# Altium PCB KeypadHW10.PcbDoc
Units mm, origin at the board's own origin, x right, y up, seen from the top; angles counter-clockwise.
Board outline 31.06 x 42.9 mm, 2 copper layers (Top Layer, Bottom Layer); 33 components, 34 nets, 107 pads, 16 vias.
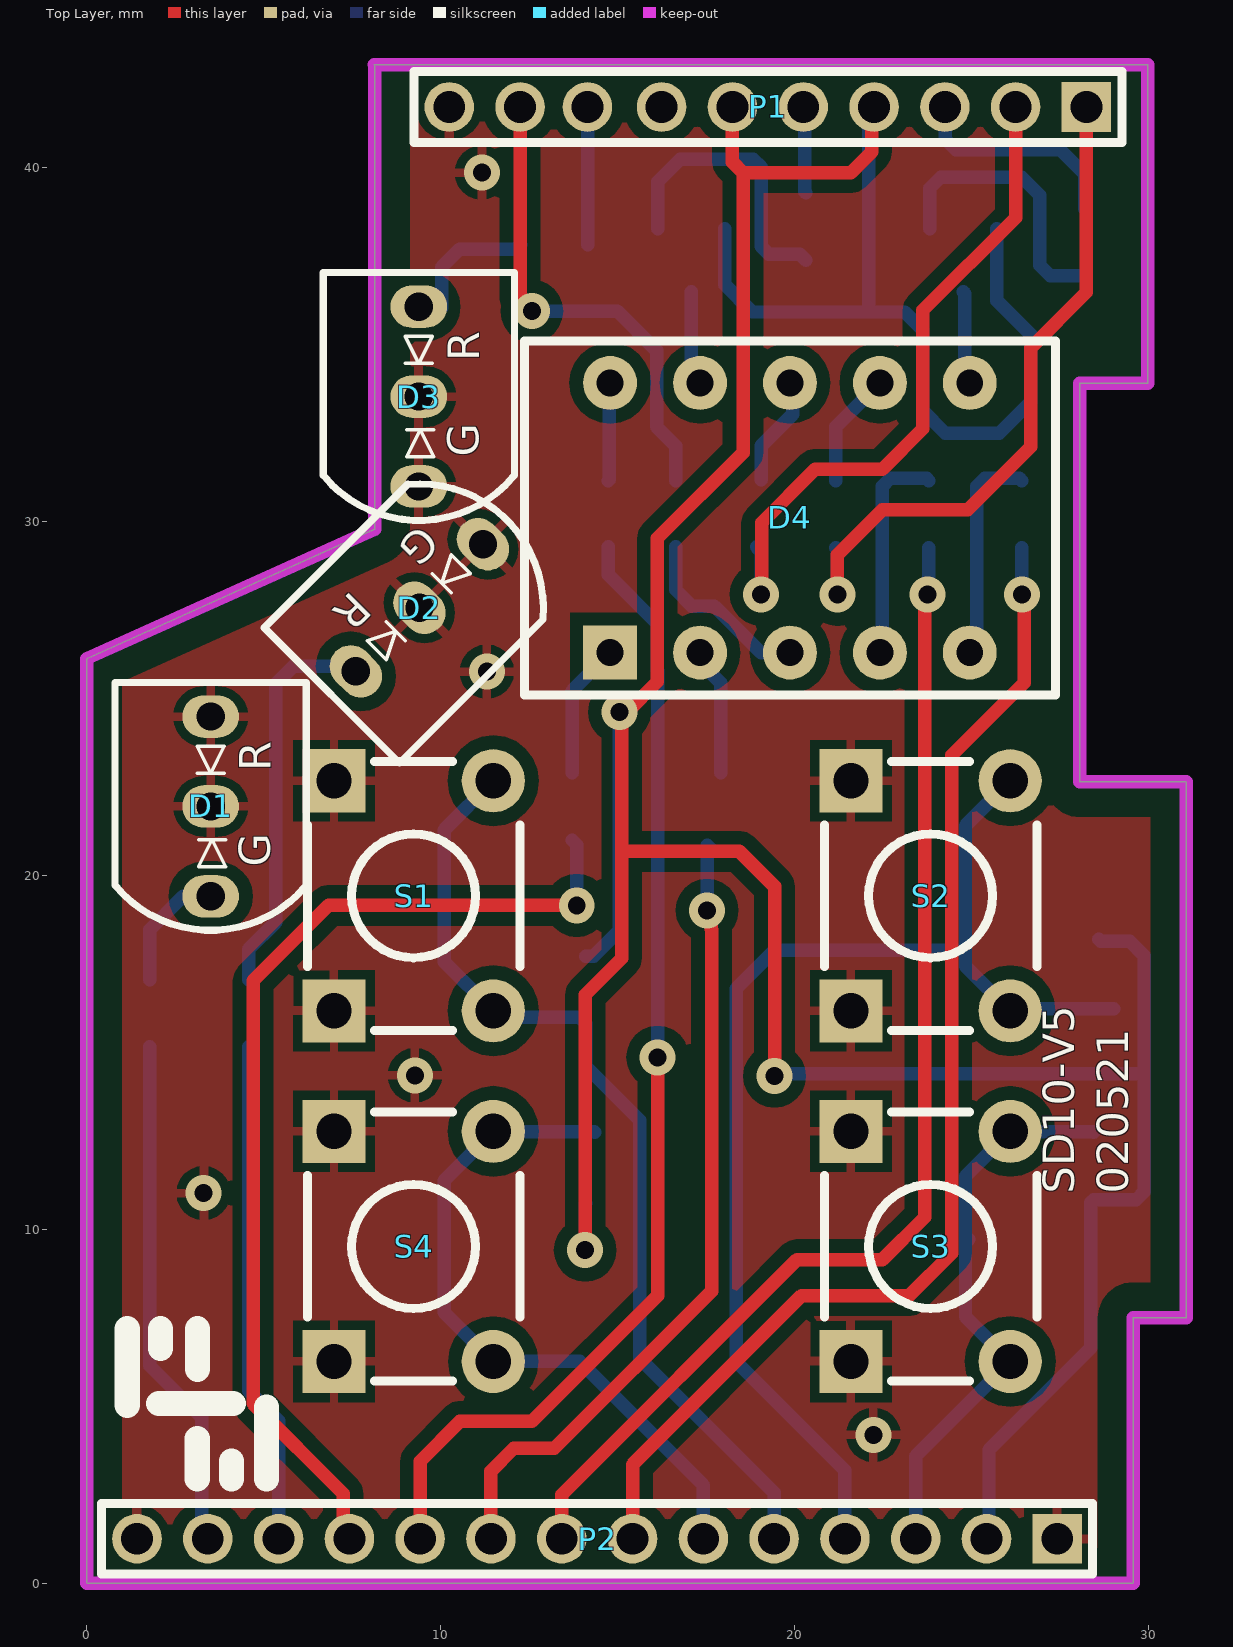
[diagram p0: Top Layer view]
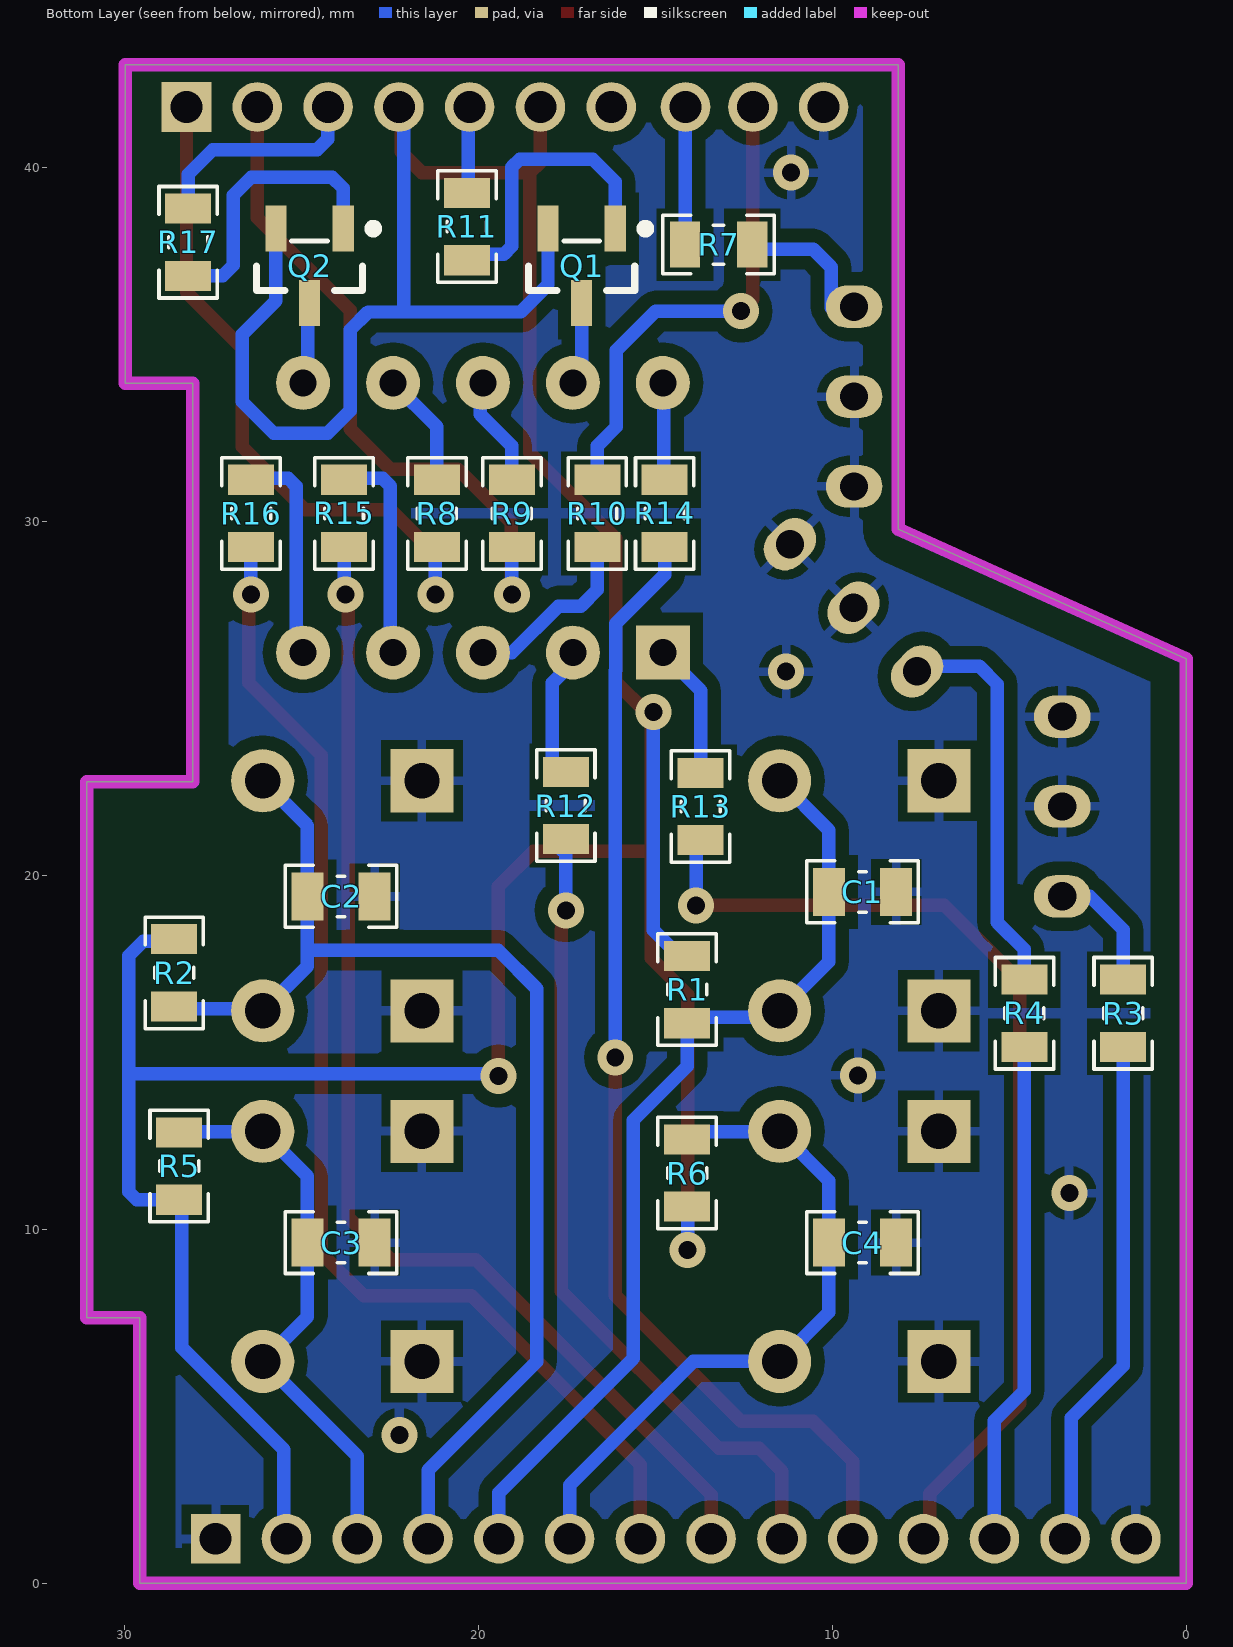
[diagram p1: Bottom Layer view, seen from below]
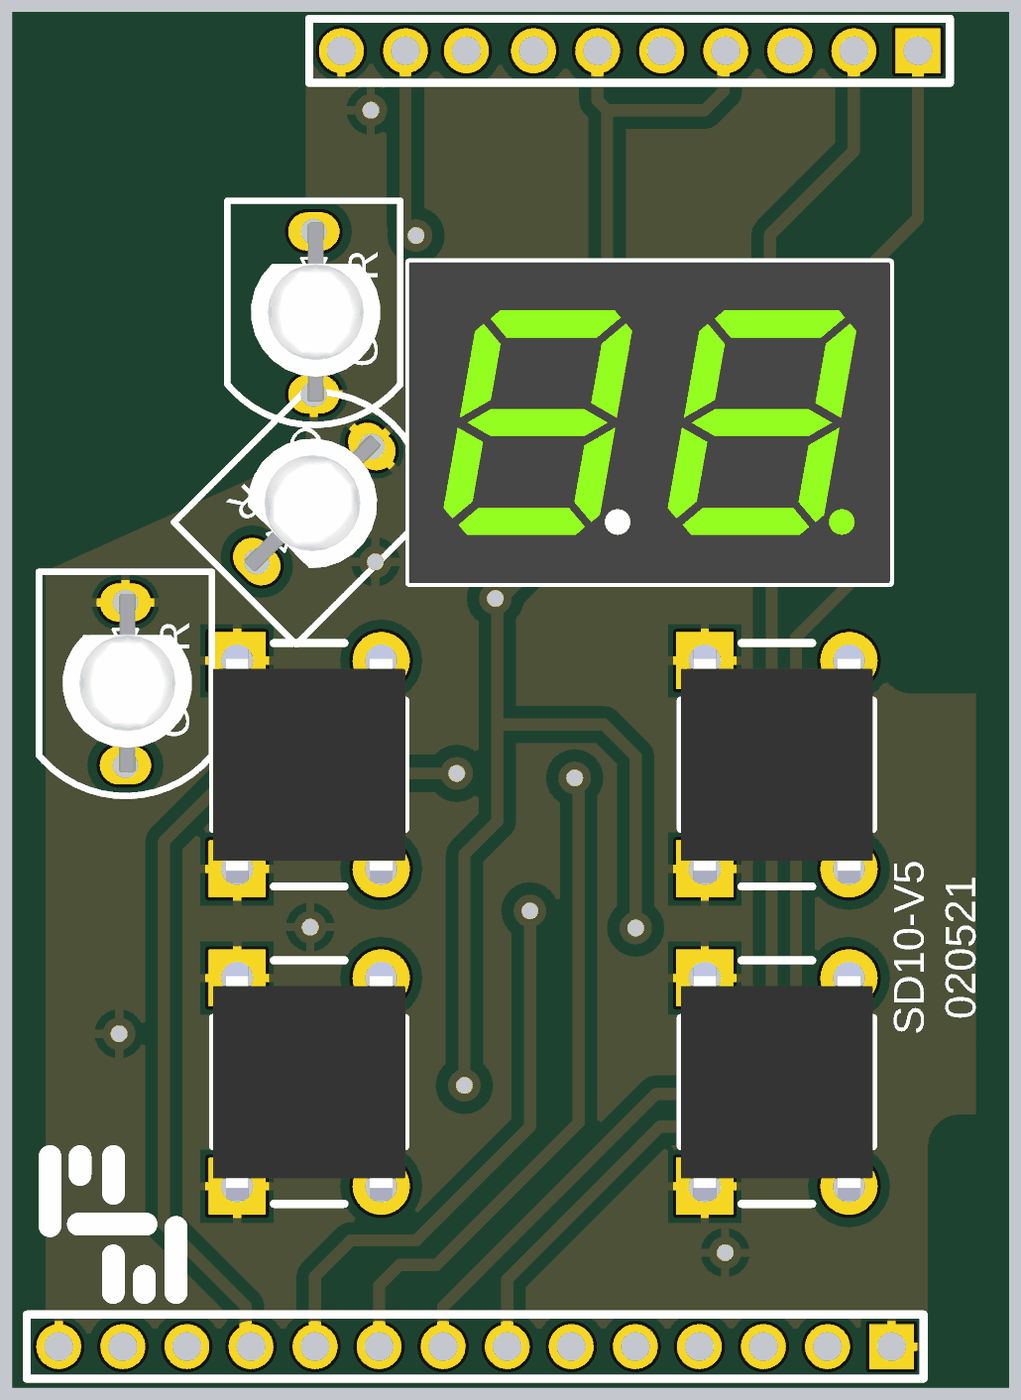
[diagram p2: 3D render of the assembled board from above, using the file's embedded part models]
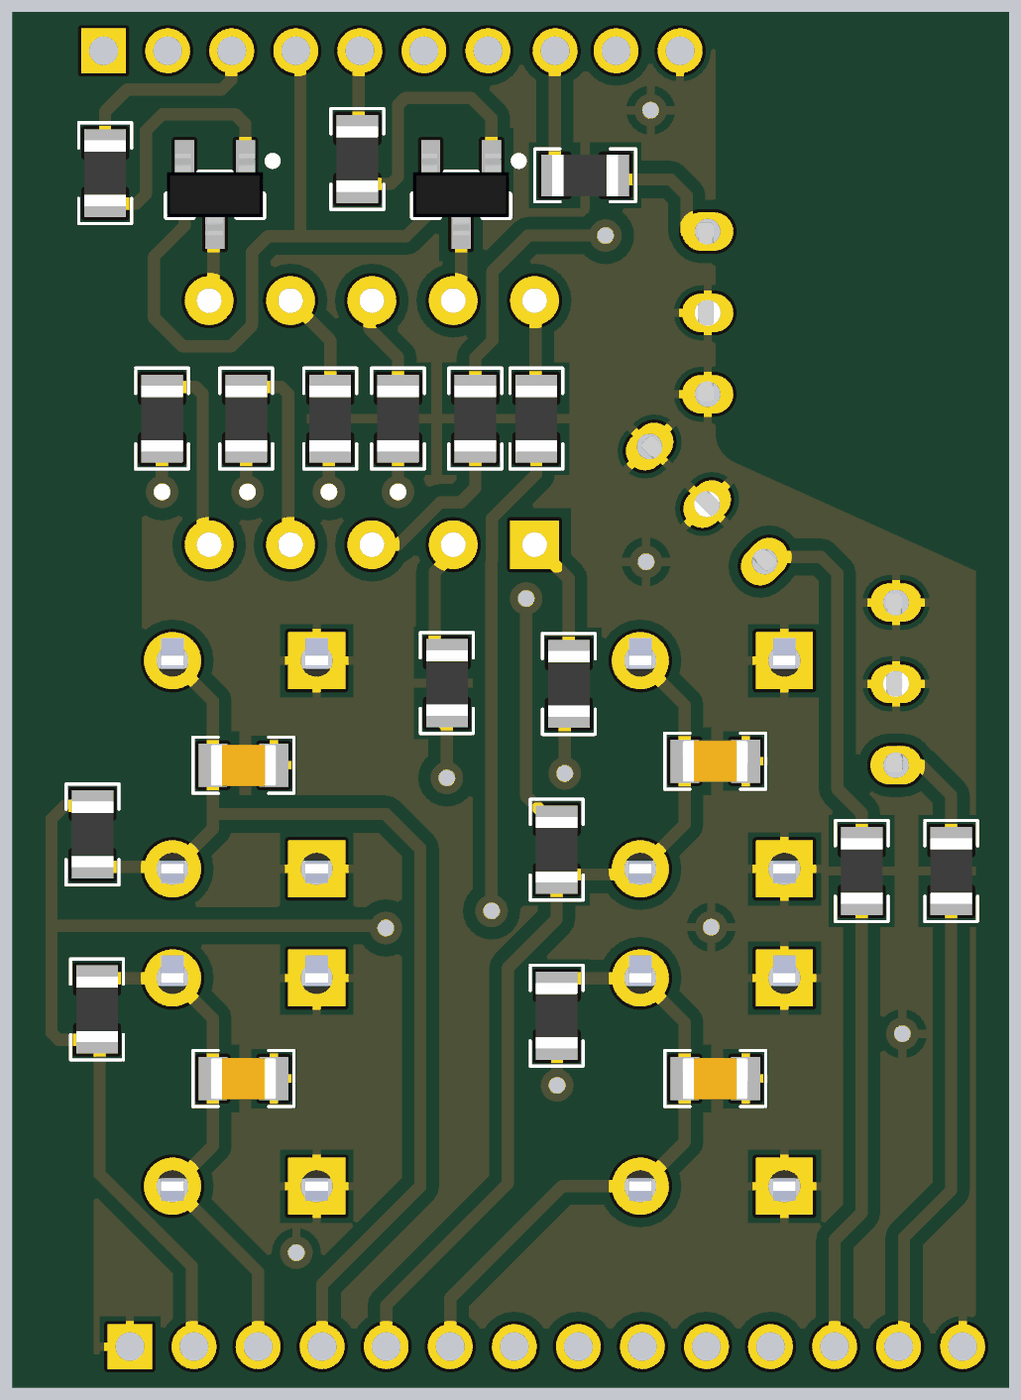
[diagram p3: 3D render of the assembled board from below, using the file's embedded part models]

## Layer stack, top to bottom
Top Solder: solder mask 0.0102, Solder Resist, Dk 3.5
Top Layer: signal copper 0.0356
Dielectric 1: dielectric 0.32, FR-4, Dk 4.8
Bottom Layer: signal copper 0.0356
Bottom Solder: solder mask 0.0102, Solder Resist, Dk 3.5

## Board outline
0,0 0,26.124 8.13,29.78 8.13,42.9 8.128,42.9 29.972,42.9 29.972,33.908 28.06,33.908 28.06,22.646 31.06,22.646 31.06,7.5 29.56,7.5 29.56,0

## Design rules (kind name [scope] priority, off if disabled: settings)
BoardOutlineClearance [All] p1: gap=1 ignorepadtopadclearanceinfootprint=FALSE
Clearance [All] p1: gap=0.381 ignorepadtopadclearanceinfootprint=FALSE except(0.254: Arc-THPad Track-THPad)
ComponentClearance [All] p1: gap=0 collisioncheckmode=3 verticalgap=0.254 showdistances=FALSE
PolygonConnect [All] p1: connectstyle=Relief reliefconductorwidth=0.254 reliefentries=4 polygonreliefangle="90 Angle" airgapwidth=0.254
RoutingVias [All] p1: holewidth=0.508 width=1.016 viastyle="Through Hole" minholewidth=0.508 minwidth=1.016 maxholewidth=0.711 maxwidth=1.27
SilkToSolderMaskClearance [IsPad] p1: minsilkscreentomaskgap=0.102 clearancetoexposedcopper=TRUE
SolderMaskExpansion [All] p1: expansion=0.102 istentingtop=FALSE
Width [All] p1: maxlimit=2.54 minlimit=0.381 preferedwidth=0.381 minimp=50.000000 maximp=50.000000 favimp=50.000000
28 further rules are at their usual default settings.

## Components (designator, comment, footprint, x,y, rotation, side; value= is the part's Value field where it differs from the comment)
C1 "100nF" CAP0805 9.144,19.532 r0 bottom
C2 "100nF" CAP0805 23.876,19.405 r0 bottom
C3 "100nF" CAP0805 23.876,9.626 r0 bottom
C4 "100nF" CAP0805 9.144,9.626 r0 bottom
D1 "LED3MM" LED3MM_R&G 3.5,21.945 r90 top
D2 "LED3MM" LED3MM_R&G 9.398,27.559 r225 top
D3 "LED3MM" LED3MM_R&G 9.382,33.526 r90 top
D4 "FYT-5631Bx" 7SEG-2DIGIT-15X10 19.866,30.1 r0 top
P1 "Header 10" HDR_1X10-2MM 19.242,41.707 r180 top
P2 "Header 14" HDR_1X14-2MM 14.419,1.258 r180 top
Q1 "PMBT3906" SOT23_N 17.079,37.219 r270 bottom
Q2 "PMBT3906" SOT23_N 24.765,37.219 r270 bottom
R1 "100K" RES0805 14.097,16.77 r90 bottom
R2 "100K" RES0805 28.589,17.246 r90 bottom
R3 "1K" RES0805 1.778,16.103 r90 bottom
R4 "1K" RES0805 4.572,16.103 r90 bottom
R5 "100K" RES0805 28.448,11.785 r270 bottom
R6 "100K" RES0805 14.097,11.589 r270 bottom
R7 "1K" RES0805 13.208,37.82 r180 bottom
R8 "220R" RES0805 21.167,30.226 r90 bottom
R9 "220R" RES0805 19.05,30.226 r90 bottom
R10 "220R" RES0805 16.637,30.226 r270 bottom
R11 "10K" RES0805 20.32,38.328 r90 bottom
R12 "220R" RES0805 17.526,21.971 r90 bottom
R13 "220R" RES0805 13.716,21.945 r90 bottom
R14 "220R" RES0805 14.732,30.226 r90 bottom
R15 "560R" RES0805 23.791,30.226 r90 bottom
R16 "220R" RES0805 26.416,30.226 r90 bottom
R17 "10K" RES0805 28.194,37.886 r90 bottom
S1 "SW-PB" SW-4PIN 9.235,19.421 r270 top
S2 "SW-PB" SW-4PIN 23.84,19.421 r270 top
S3 "SW-PB" SW-4PIN 23.84,9.515 r270 top
S4 "SW-PB" SW-4PIN 9.235,9.515 r270 top

## Footprints (in the part's own frame and the unit in brackets; to place one, negate y for a bottom-side part, rotate by r counter-clockwise, add the part's x,y. Pads: shape width x height; smd on the part's side, far side on the other; paste and mask are expansions set on the pad)
7SEG-2DIGIT-15X10 [mil] "0.28\" 2-DIGIT,CL2821BS"
  rect 60x60 hole 30: 1(-200,-150)
  round 60 hole 30: 2(-100,-150) 3(0,-150) 4(100,-150) 5(200,-150) 6(200,150) 7(100,150) 8(0,150) 9(-100,150) 10(-200,150)
  silkscreen extent -295,-197 295,197, body extent -296,-197 296,197, height 240
CAP0805 [mm] "Chip Capacitor, 2-Leads, Body 2/00x1/25mm, IPC Medium Density DESIGNER:ABBAS BASEREH"
  rect 0.9x1.35 smd: 1(-0.95,0) 2(0.95,0)
  silkscreen extent -1.58,-0.87 1.58,0.87, body extent -1.02,-0.65 1.02,0.65, height 0.5
HDR_1X10-2MM [mm]
  rect 1.4x1.4 hole 0.9: 1(-9,0)
  round 1.4 hole 0.9: 2(-7,0) 3(-5,0) 4(-3,0) 5(-1,0) 6(1,0) 7(3,0) 8(5.097,0) 9(7,0)
  round 1.4 hole 0.9 mask+0.102: 10(9,0)
  silkscreen extent -10,-1 10,1
HDR_1X14-2MM [mm]
  rect 1.4x1.4 hole 0.9: 1(-13,0)
  round 1.4 hole 0.9: 2(-11,0) 3(-9,0) 4(-7,0) 5(-5,0) 6(-3,0) 7(-1,0) 8(1,0) 9(3,0) 10(5,0) 11(7,0) 12(9,0) 13(11,0) 14(13,0)
  silkscreen extent -14,-1 14,1
LED3MM_R&G [mm] "3mm (T1) Package Discrete LED  RED/GREEN, Bi-Color"
  oval 1.2x1.6 hole 0.8: 1(-2.54,0) 2(0,0) 3(2.54,0)
  silkscreen extent -3.5,-2.7 3.5,2.7, body extent -2.76,-2.08 2.82,1.97, height 7.01
RES0805 [mm] "Chip Resistor, 2-Leads, Body 2/00x1/25mm, IPC Medium Density DESIGNER:ABBAS BASEREH"
  rect 0.85x1.3 smd: 1(-0.95,0) 2(0.95,0)
  silkscreen extent -1.58,-0.82 1.58,0.82, body extent -1.02,-0.65 1.02,0.65, height 0.5
SOT23_N [mm] "SOT23, 3-Leads, Body 2.9x1.3mm, Pitch 0.95mm, Lead Span 2.3mm, IPC Medium Density"
  rect 1.3x0.6 smd: 1(-1.05,0.95) 2(-1.05,-0.95) 3(1.05,0)
  silkscreen extent -1.17,-1.5 0.7,1.92, body extent -1.27,-1.5 1.27,1.5, height 1.1
SW-4PIN [mm]
  rect 1.784x1.784 hole 1: 1(-3.25,-2.25) 1(3.25,-2.25)
  round 1.784 hole 1: 2(-3.25,2.25) 2(3.25,2.25)
  silkscreen extent -3.8,-3 3.8,3, body extent -3.95,-3 3.7,3, height 9.65

## Part data
C1 C2 C3 C4: library part Cap, "Capacitor", LatestRevisionDate=17-Jul-2002, LatestRevisionNote="Re-released for DXP Platform.", PackageDescription="Radial Cap, Thru-Hole; 2 Leads; 0.3 in Pin Spacing", PackageReference=RAD-0.3, Published=8-Jun-2000, Publisher="Altium Limited"
D1 D2 D3: library part LED_2C_CC, "LED BICOLOR CC", Data=16-12-2016, Designer="Abbas Basereh"
D4: library part 7SEG-2DIGIT-10PIN, "CA-3digit-7Seg-10PIN"
P1: "Header, 10-Pin", LatestRevisionDate=17-Jul-2002, LatestRevisionNote="Re-released for DXP Platform.", Publisher="Altium Limited"
P2: "Header, 14-Pin", LatestRevisionDate=17-Jul-2002, LatestRevisionNote="Re-released for DXP Platform.", Publisher="Altium Limited"
Q1 Q2: "PNP Switching Transistor", ComponentLink1Description="Manufacturer Link", ComponentLink1URL=http://www.semiconductors.philips.com/, ComponentLink2Description=Datasheet, ComponentLink2URL=http://www.semiconductors.philips.com/acrobat/datasheets/PMBT3906_4.pdf, DatasheetVersion=27-Apr-1999, LatestRevisionDate=12-Dec-2006, LatestRevisionNote="IPC-7351 Footprint Added.", PackageDescription="3-Pin SOT-23 Package 0.95 mm Pitch, 2.3 mm Lead Span", PackageReference=SOT23, PackageVersion=May-1999, Published=17-Sep-2003, Publisher="Altium Limited"
R1 R2 R3 R4 R5 R6 R7 R8 R9 R10 R11 R12 R13 R14 R15 R16 R17: library part "Res Semi", "Semiconductor Resistor", LatestRevisionDate=17-Jul-2002, LatestRevisionNote="Re-released for DXP Platform.", PackageDescription="Axial Device, Thru-Hole; 2 Leads; 0.5 in Pin Spacing", PackageReference=AXIAL-0.5, Published=8-Jun-2000, Publisher="Altium Limited"
S1 S2 S3 S4: "Switch", LatestRevisionDate=17-Jul-2002, LatestRevisionNote="Re-released for DXP Platform.", PackageDescription="Switch; 2 Leads", PackageReference=SPST-2, Published=24-Mar-1999, Publisher="Altium Limited"

## Via types
v1: diameter 1.016, hole 0.508, Top Layer to Bottom Layer, tented both sides, 16 vias

## Nets (pads, with @x,y where several pads share a name; then routed paths per layer and width w, separated by ;. In a path a pad name is that pad's centre, name@x,y a point inside that pad or via, vN(x,y) a via of type N, cw(c..) or ccw(c..) an arc to the next point about the centre after c; other vN are vias at no path point)
+3V3: P1.4 P1.6 P2.2 Q1.2 Q2.2 R1.2 R2.2 R5.2 R6.2 | length 114.2
  Top Layer w0.381: v1(14.083,9.412) 14.083,16.623 15.113,17.653 15.113,20.675 ; v1(15.05,24.612) 15.113,24.549 15.113,20.675 ; v1@15.113,24.612 15.261,24.612 16.12,25.471 16.12,29.52 18.542,31.942 18.542,39.852 ; P1.6 18.242,40.152 18.542,39.852 ; v1(19.431,14.325) 19.431,19.685 18.441,20.675 15.113,20.675 ; P1.4 22.173,41.638 22.173,40.435 21.59,39.852 18.542,39.852
  Bottom Layer w0.381: v1(14.083,9.412) 14.083,10.72 R6.2@14.097,10.734 ; R1.2 14.322,17.72 15.05,18.447 v1(15.05,24.612) ; Q1.2 18.029,36.682 18.796,35.915 22.098,35.915 ; v1(19.431,14.325) 19.558,14.325 19.627,14.394 29.87,14.394 ; P1.4 22.098,41.563 22.098,35.915 ; P2.2 25.49,1.329 25.49,3.773 28.37,6.653 28.37,10.757 R5.2 29.646,10.835 29.87,11.058 29.87,14.394 ; Q2.2 25.715,36.235 26.67,35.28 26.67,33.375 25.781,32.486 24.257,32.486 23.613,33.131 23.613,35.417 23.114,35.915 22.098,35.915 ; R2.2 28.649,18.135 29.464,18.135 29.87,17.729 29.87,14.394
GND: C1.1 C2.1 C3.1 C4.1 D1.2 D1.3 D2.1 D2.2 D3.1 D3.2 P1.10 P2.1 P2.14 S1.1 S2.1 S3.1 S4.1
  other v1: 22.225,4.191 3.302,11.023 9.271,14.351 11.303,25.755 11.163,39.852
KEY_Power: C4.2 P2.6 R6.1 S4.2 | length 19.5
  Top Layer w0.381: S4.2@11.485,6.265 S4.2@11.553,6.197
  Bottom Layer w0.381: R6.1@14.351,12.735 14.336,12.75 11.5,12.75 11.485,12.765 10.094,11.374 C4.2 10.094,7.656 11.485,6.265 13.928,6.265 17.419,2.774 P2.6
KEY_StartStop: C1.2 P2.5 R1.1 S1.2 | length 27.2
  Bottom Layer w0.381: S1.2@11.485,22.671 10.094,21.28 10.094,17.562 11.485,16.171 11.661,15.995 13.921,15.995 R1.1 14.097,14.605 15.621,13.081 15.621,6.35 19.419,2.552 P2.5
KEY_SyringeType: C3.2 P2.3 R5.1 S3.2 | length 16.2
  Bottom Layer w0.381: P2.3 23.419,3.594 26.09,6.265 26.09,6.269 24.826,7.533 C3.2 ; C3.2@24.923,9.723 C3.2 ; R5.1 28.433,12.75 26.105,12.75 26.09,12.765 24.826,11.501 C3.2
KEY_Time: C2.2 P2.4 R2.1 S2.2 | length 34.2
  Bottom Layer w0.381: P2.4 21.419,3.193 18.351,6.261 18.351,16.802 19.431,17.881 24.826,17.881 ; S2.2@26.09,22.671 24.826,21.407 24.826,17.881 ; R2.1@29.021,16.234 26.153,16.234 26.09,16.171 24.826,17.435 24.826,17.881
LED_ALARM: P2.12 R4.1 | length 14.2
  Bottom Layer w0.381: R4.1 4.572,5.435 5.419,4.588 P2.12
LED_BAT: P1.8 R7.1 | length 3.9
  Bottom Layer w0.381: P1.8 14.151,41.7 14.151,37.827 R7.1
LED_SS: P2.13 R3.1 | length 14.6
  Bottom Layer w0.381: R3.1 1.778,6.143 3.248,4.673 3.248,1.429 P2.13
NetD1_1: D1.1 R3.2 | length 3
  Bottom Layer w0.381: R3.2 1.778,18.462 2.721,19.405 2.921,19.405 D1.1@2.984,19.342
NetD2_3: D2.3 R4.2 | length 11.2
  Bottom Layer w0.381: R4.2 4.572,17.907 5.334,18.669 5.334,25.4 5.838,25.904 7.461,25.904 D2.3
NetD3_3: D3.3 R7.2 | length 3.6
  Bottom Layer w0.381: D3.3@10.033,36.04 10.033,37.185 10.541,37.693 12.131,37.693 R7.2
NetD4_1: D4.1 R13.2 | length 3.8
  Bottom Layer w0.381: R13.2 13.716,25.22 D4.1
NetD4_2: D4.2 R12.2 | length 3.6
  Bottom Layer w0.381: D4.2 17.326,26.015 17.907,25.434 R12.2@17.907,22.895
NetD4_3: D4.3 R10.2 | length 5.4
  Bottom Layer w0.381: R10.2 16.637,28.067 17.098,27.606 17.735,27.606 19.05,26.291 D4.3 ; D4.3@19.738,26.162 D4.3
NetD4_4: D4.4 R15.2 | length 6.2
  Bottom Layer w0.381: D4.4 22.479,26.363 22.479,30.993 22.702,31.216 23.725,31.216 R15.2@23.791,31.15
NetD4_5: D4.5 R16.2 | length 6.2
  Bottom Layer w0.381: D4.5 25.146,26.49 25.146,30.993 25.369,31.216 26.35,31.216 R16.2@26.416,31.15
NetD4_6: D4.6 Q2.3 | length 2.6
  Bottom Layer w0.381: Q2.3@24.765,36.482 24.811,36.436 24.811,34.045 D4.6
NetD4_7: D4.7 R8.2 | length 3.3
  Bottom Layer w0.381: R8.2@21.167,31.15 21.167,32.671 D4.7
NetD4_8: D4.8 R9.2 | length 3.1
  Bottom Layer w0.381: R9.2 19.05,32.131 19.939,33.02 19.939,33.837 D4.8
NetD4_9: D4.9 Q1.3 | length 2.7
  Bottom Layer w0.381: Q1.3@17.079,36.482 17.079,34.432 17.326,34.185 D4.9
NetD4_10: D4.10 R14.2 | length 2.8
  Bottom Layer w0.381: R14.2@14.732,31.15 14.759,31.177 14.759,33.883 D4.10
NetQ1_1: Q1.1 R11.1 | length 8.3
  Bottom Layer w0.381: Q1.1 16.129,39.598 16.764,40.233 18.827,40.233 19.05,40.01 19.05,37.772 19.273,37.549 20.149,37.549 R11.1
NetQ2_1: Q2.1 R17.1 | length 8
  Bottom Layer w0.381: Q2.1 23.815,39.41 24.13,39.725 26.416,39.725 26.924,39.217 26.924,37.234 27.222,36.936 R17.1
SEG_A: P1.1 R8.1 | length 19.7
  Top Layer w0.381: v1@21.209,27.813 21.209,29.057 22.479,30.327 24.892,30.327 26.67,32.105 26.67,34.899 28.242,36.471 P1.1
  Bottom Layer w0.381: R8.1@21.167,29.25 21.209,29.208 v1@21.209,27.813
  other v1: 21.209,27.94
SEG_B: P1.2 R9.1 | length 19.3
  Top Layer w0.381: v1(19.05,27.94) 19.066,27.956 19.066,29.962 20.574,31.47 22.479,31.47 23.622,32.613 23.622,35.962 26.242,38.582 P1.2
  Bottom Layer w0.381: R9.1@18.923,29.276 19.05,29.149 v1(19.05,27.94)
SEG_C: P1.9 R10.1 | length 13.8
  Top Layer w0.381: P1.9 12.242,36.272 v1(12.573,35.941)
  Bottom Layer w0.381: v1(12.573,35.941) 14.986,35.941 16.098,34.829 16.098,32.67 16.637,32.131 R10.1@16.637,31.15
SEG_D: P2.9 R12.1 | length 23.1
  Top Layer w0.381: P2.9 11.419,3.164 12.065,3.81 13.208,3.81 17.653,8.255 17.653,18.469 17.648,18.475 17.648,18.888 v1(17.526,19.01)
  Bottom Layer w0.381: v1(17.526,19.01) 17.526,20.854 R12.1@17.653,20.727
SEG_DP: P2.7 R16.1 | length 34.4
  Top Layer w0.381: P2.7 15.419,3.354 20.193,8.128 23.241,8.128 24.438,9.325 24.438,23.396 26.484,25.442 26.484,27.592 v1@26.416,27.66
  Bottom Layer w0.381: R16.1@26.416,29.25 26.421,29.245 v1@26.421,27.66
  other v1: 26.416,27.94
SEG_E: P2.11 R13.1 | length 28.8
  Top Layer w0.381: P2.11 7.25,1.427 7.25,2.529 4.699,5.08 4.699,17.018 6.832,19.151 v1(13.843,19.151)
  Bottom Layer w0.381: R13.1 13.843,20.868 v1(13.843,19.151)
SEG_F: P2.10 R14.1 | length 32.6
  Top Layer w0.381: P2.10 9.419,3.45 10.541,4.572 12.573,4.572 16.129,8.128 v1(16.129,14.859)
  Bottom Layer w0.381: R14.1 14.732,28.497 16.12,27.109 16.12,25.79 16.129,25.781 v1(16.129,14.859)
SEG_G: P2.8 R15.1 | length 33.7
  Top Layer w0.381: P2.8 13.419,2.497 20.066,9.144 22.479,9.144 23.676,10.341 23.676,27.587 v1@23.749,27.66
  Bottom Layer w0.381: v1@23.749,27.66 23.791,27.702 R15.1@23.791,29.25
  other v1: 23.749,27.94
SEG_NUM1: P1.5 R11.2 | length 2.5
  Bottom Layer w0.381: P1.5 20.281,41.668 20.281,39.317 R11.2
SEG_NUM2: P1.3 R17.2 | length 6.2
  Bottom Layer w0.381: P1.3 24.257,41.692 24.257,40.797 24.555,40.499 27.503,40.499 28.194,39.808 R17.2
pads on no net: P1.7

## Polygon pours and split planes (outlines as drawn)
GND on Top Layer "GND_L01_P000" (solid, remove dead copper, pour order 0): 29.972,42.9 29.972,33.908 28.06,33.908 28.06,22.646 31.06,22.646 31.06,7.5 29.56,7.5 29.56,0 0,0 0,26.124 8.36,29.78 8.36,42.9
GND on Bottom Layer "GND_L02_P001" (solid, remove dead copper, pour order 1): 29.972,42.9 29.972,33.908 28.06,33.908 28.06,22.646 31.06,22.646 31.06,7.5 29.56,7.5 29.56,0 0,0 0,26.124 8.36,29.78 8.36,42.9

## Keep-outs
Keep-Out Layer:
  lines w0.381: 8.128,42.9 29.972,42.9 29.972,33.908 28.06,33.908 28.06,22.646 31.06,22.646 31.06,7.5 29.56,7.5 29.56,0 0,0 0,26.124 8.13,29.78 8.13,42.9

## Silkscreen, mask and mechanical layers (free items; w line width, h text height)
Top Overlay:
  lines w0.711: 1.143,5.029 1.143,7.188 ; 2.032,5.08 4.14,5.08 ; 2.083,6.629 2.083,7.188 ; 3.122,2.946 3.122,4.089 ; 3.124,6.045 3.124,7.188 ; 4.089,2.946 4.089,3.454 ; 5.08,2.946 5.08,4.978
  text "SD10-V5 / 020521" at 29.718,11.01 h1.52 r90

## Text inside footprints (layer, text, board x,y; h text height)
D1: Top Overlay "G" at 5.484,20.245 h1.52 r90; Top Overlay "R" at 5.5,22.945 h1.52 r90
D2: Top Overlay "G" at 9.197,30.164 h1.52 r225; Top Overlay "R" at 7.277,28.266 h1.52 r225
D3: Top Overlay "G" at 11.366,31.826 h1.52 r90; Top Overlay "R" at 11.382,34.526 h1.52 r90